# Altium PCB PCB1.PcbDoc
Units mm, origin at the board's own origin, x right, y up, seen from the top; angles counter-clockwise.
Board outline 152.4 x 101.6 mm, 2 copper layers (Top Layer, Bottom Layer); 55 components, 52 nets, 259 pads, 13 vias.
Unrouted connection lines stored in the file: 144.
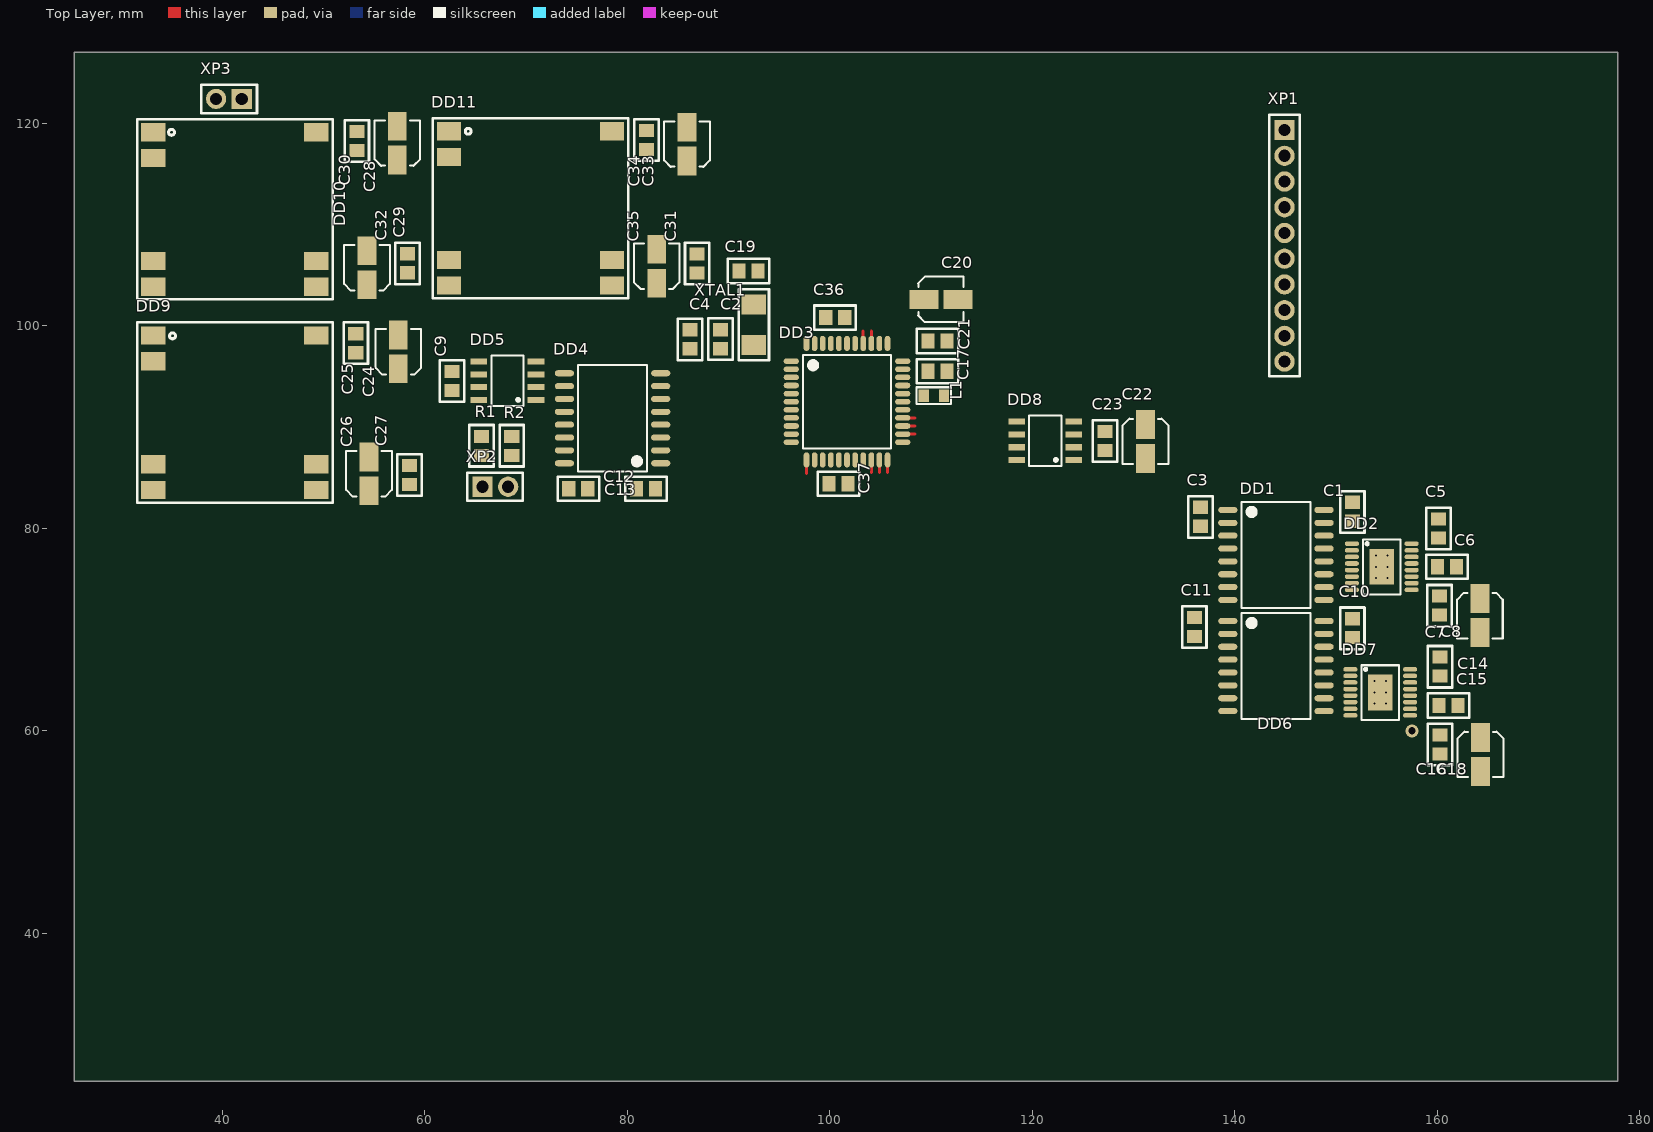
[diagram p0: Top Layer view]
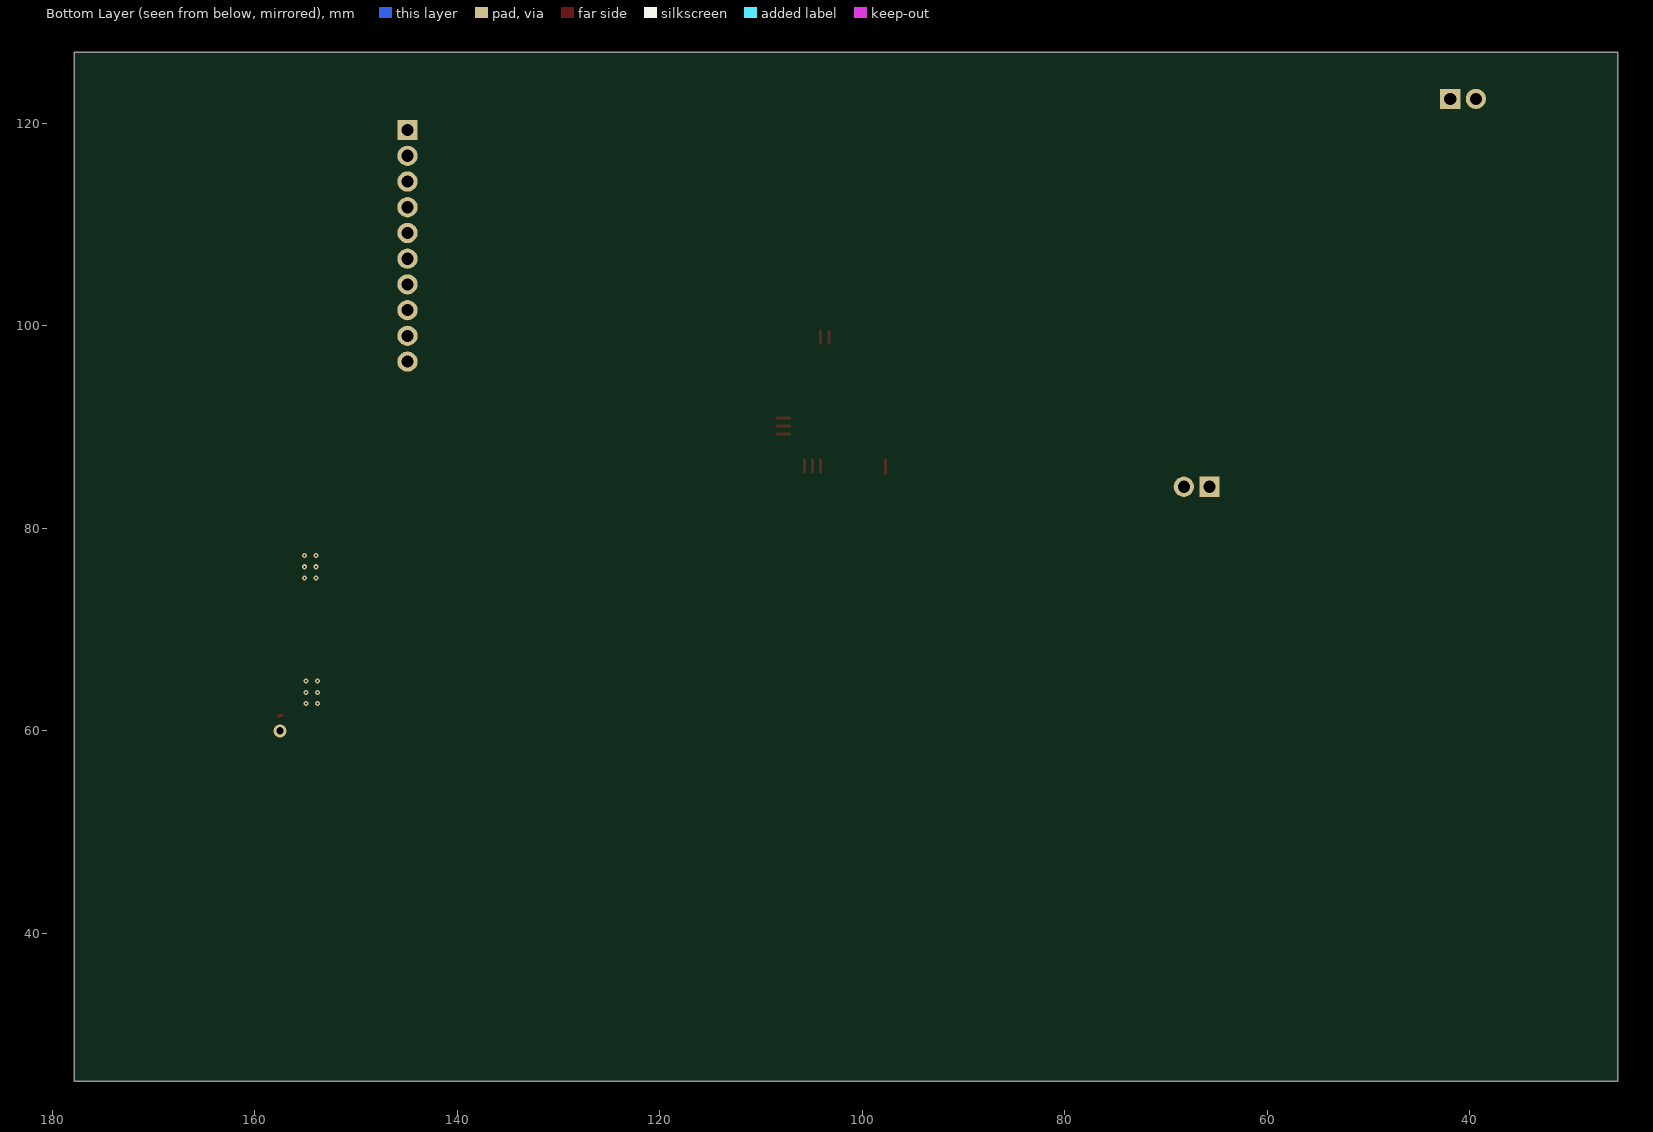
[diagram p1: Bottom Layer view, seen from below]

## Layer stack, top to bottom
Top Solder: solder mask 0.0102, Solder Resist, Dk 3.5
Top Layer: signal copper 0.0356
Dielectric 1: dielectric 0.32, FR-4, Dk 4.8
Bottom Layer: signal copper 0.0356
Bottom Solder: solder mask 0.0102, Solder Resist, Dk 3.5

## Board outline
25.4,25.4 177.8,25.4 177.8,127 25.4,127

## Design rules (kind name [scope] priority, off if disabled: settings)
Clearance [All] p1: gap=0.1 ignorepadtopadclearanceinfootprint=FALSE
HoleSize [All] p1: absolutevalues=TRUE maxlimit=5 minlimit=0.5 maxpercent=80.000 minpercent=20.000
HoleToHoleClearance [All] p1: gap=0.3 allowstackedmicrovias=TRUE
PolygonConnect [All] p1: connectstyle=Relief reliefconductorwidth=0.254 reliefentries=4 polygonreliefangle="90 Angle" airgapwidth=0.254
RoutingVias [All] p1: holewidth=0.6 width=1 viastyle="Through Hole" minholewidth=0.6 minwidth=1 maxholewidth=0.6 maxwidth=1
SilkToSilkClearance [All] p1: silktosilkclearance=0.3
SilkToSolderMaskClearance [IsPad] p1: minsilkscreentomaskgap=0.2 clearancetoexposedcopper=TRUE
SolderMaskExpansion [All] p1: expansion=0.102 istentingtop=FALSE
Width [All] p1: maxlimit=4 minlimit=0.2 preferedwidth=0.3
26 further rules are at their usual default settings.

## Components (designator, comment, footprint, x,y, rotation, side; value= is the part's Value field where it differs from the comment)
C1 "0.1мкФ" Capacitor_0805 151.6,82.575 r270 top
C2 "22пкФ" Capacitor_0805 89.2,97.725 r90 top
C3 "0.1мкФ" Capacitor_0805 136.6,82.075 r270 top
C4 "22пкФ" Capacitor_0805 86.2,99.6 r270 top
C5 "22пкФ" Capacitor_0805 160.1,79.025 r90 top
C6 "0.1мкФ" Capacitor_0805 160,76.2 r0 top
C7 "0.1мкФ" Capacitor_0805 160.2,73.3 r270 top
C8 "https://www.compel.ru/wordpress/wp-content/uploads/2014/02/yageo_ELCAP.pdf" CAPAE4643X46M 164.2,73.05 r270 top
C9 "0.1мкФ" Capacitor_0805 62.7,95.475 r270 top
C10 "0.1мкФ" Capacitor_0805 151.6,71.075 r270 top
C11 "0.1мкФ" Capacitor_0805 136,69.3 r90 top
C12 "0.1мкФ" Capacitor_0805 74.225,83.9 r0 top
C13 "0.1мкФ" Capacitor_0805 82.8,83.9 r180 top
C14 "0.022мкФ" Capacitor_0805 160.25,67.275 r270 top
C15 "0.1мкФ" Capacitor_0805 160.15,62.5 r0 top
C16 "0.1мкФ" Capacitor_0805 160.25,59.6 r270 top
C17 "0.1мкФ" Capacitor_0805 111.575,95.5 r180 top
C18 "https://www.compel.ru/wordpress/wp-content/uploads/2014/02/yageo_ELCAP.pdf" CAPAE4643X46M 164.25,59.35 r270 top
C19 "0.1мкФ" Capacitor_0805 91.025,105.4 r0 top
C20 "https://www.compel.ru/wordpress/wp-content/uploads/2014/02/yageo_ELCAP.pdf" CAPAE4643X46M 109.3,102.6 r0 top
C21 "0.1мкФ" Capacitor_0805 109.7,98.5 r0 top
C22 "https://www.compel.ru/wordpress/wp-content/uploads/2014/02/yageo_ELCAP.pdf" CAPAE4643X46M 131.175,90.25 r270 top
C23 "0.1мкФ" Capacitor_0805 127.175,89.55 r270 top
C24 "https://www.compel.ru/wordpress/wp-content/uploads/2014/02/yageo_ELCAP.pdf" CAPAE4643X46M 57.4,95.75 r90 top
C25 "0.1мкФ" Capacitor_0805 53.2,97.327 r90 top
C26 "https://www.compel.ru/wordpress/wp-content/uploads/2014/02/yageo_ELCAP.pdf" CAPAE4643X46M 54.5,83.7 r90 top
C27 "0.1мкФ" Capacitor_0805 58.5,84.325 r90 top
C28 "https://www.compel.ru/wordpress/wp-content/uploads/2014/02/yageo_ELCAP.pdf" CAPAE4643X46M 57.3,116.35 r90 top
C29 "0.1мкФ" Capacitor_0805 58.3,107.1 r270 top
C30 "0.1мкФ" Capacitor_0805 53.3,119.175 r270 top
C31 "0.1мкФ" Capacitor_0805 86.9,105.2 r90 top
C32 "https://www.compel.ru/wordpress/wp-content/uploads/2014/02/yageo_ELCAP.pdf" CAPAE4643X46M 54.3,104.05 r90 top
C33 "https://www.compel.ru/wordpress/wp-content/uploads/2014/02/yageo_ELCAP.pdf" CAPAE4643X46M 85.9,116.25 r90 top
C34 "0.1мкФ" Capacitor_0805 81.9,117.4 r90 top
C35 "https://www.compel.ru/wordpress/wp-content/uploads/2014/02/yageo_ELCAP.pdf" CAPAE4643X46M 82.9,104.2 r90 top
C36 "0.1мкФ" Capacitor_0805 101.475,100.8 r180 top
C37 "0.1мкФ" Capacitor_0805 101.8,84.4 r180 top
DD1 "ADuM1401" ADUM_SOIC 139.3,81.81 r0 top
DD2 "DRV8874" DRV8874_TSOP127P600-8N 151.55,78.475 r0 top
DD3 "ATMEGA16-8UA" ATMEGA16-44A 96.2,96.5 r0 top
DD4 "ADuM1301" ADUM_SOIC 83.3,86.42 r180 top
DD5 "ADM485" "SOIC_N8 (REF198, ADM485)" 71,92.66 r180 top
DD6 "ADuM1401" ADUM_SOIC 139.3,70.84 r0 top
DD7 "DRV8874" DRV8874_TSOP127P600-8N 151.4,66.075 r0 top
DD8 "REF198" "SOIC_N8 (REF198, ADM485)" 124.1,86.73 r180 top
DD9 "TMR-1-2411SM" TMR1SM_SMD 33.2,99.027 r180 top
DD10 "TDR-2-2411SM" TMR1SM_SMD 33.2,119.1 r180 top
DD11 "TMR-1-2411SM" TMR1SM_SMD 62.4,119.2 r180 top
L1 "Fixed inductor, 10мкГн, ±20%, 0805, 100mA, -55...+125°C" "IND: 0805" 110.275,93.1 r180 top value=10мкГн
R1 "120 Ом" resistor_0805 65.6,87.2 r90 top
R2 "120 Ом" resistor_0805 68.6,87.2 r90 top
XP1 "PIN_10" fpc_connector_10 144.9,119.32 r0 top
XP2 "PLS-2" fpc_connector_2pin 65.7,84.1 r90 top
XP3 "PLS-2" fpc_connector_2pin 41.94,122.4 r270 top
XTAL1 "8МГц" Z_0503 92.5,98.1 r90 top

## Footprints (in the part's own frame and the unit in brackets; to place one, negate y for a bottom-side part, rotate by r counter-clockwise, add the part's x,y. Pads: shape width x height; smd on the part's side, far side on the other; paste and mask are expansions set on the pad)
ADUM_SOIC [mm]
  oval 1.9x0.6 smd: 1(0,0) 2(0,-1.27) 3(0,-2.54) 4(0,-3.81) 5(0,-5.08) 6(0,-6.35) 7(0,-7.62) 8(0,-8.89) 9(9.5,-8.89) 10(9.5,-7.62) 11(9.5,-6.35) 12(9.5,-5.08) 13(9.5,-3.81) 14(9.5,-2.54) 15(9.5,-1.27) 16(9.5,0)
  silkscreen extent 1.35,-9.69 8.15,0.8
ATMEGA16-44A [mm]
  oval 1.5x0.55 smd: 1(0,0) 2(0,-0.8) 3(0,-1.6) 4(0,-2.4) 5(0,-3.2) 6(0,-4) 7(0,-4.8) 8(0,-5.6) 9(0,-6.4) 10(0,-7.2) 11(0,-8) 23(11,-8) 24(11,-7.2) 25(11,-6.4) 26(11,-5.6) 27(11,-4.8) 28(11,-4) 29(11,-3.2) 30(11,-2.4) 31(11,-1.6) 32(11,-0.8) 33(11,0)
  oval 0.55x1.5 smd: 12(1.5,-9.75) 13(2.3,-9.75) 14(3.1,-9.75) 15(3.9,-9.75) 16(4.7,-9.75) 17(5.5,-9.75) 18(6.3,-9.75) 19(7.1,-9.75) 20(7.9,-9.75) 21(8.7,-9.75) 22(9.5,-9.75) 34(9.5,1.75) 35(8.7,1.75) 36(7.9,1.75) 37(7.1,1.75) 38(6.3,1.75) 39(5.5,1.75) 40(4.7,1.75) 41(3.9,1.75) 42(3.1,1.75) 43(2.3,1.75) 44(1.5,1.75)
  silkscreen extent 1.15,-8.6 9.85,0.6, body extent 1.15,-8.6 9.85,0.6, height 1.2
Capacitor_0805 [mm]
  rect 1.3x1.5 smd: 1(0,0) 2(1.875,0)
  silkscreen extent -1.1,-1.2 3,1.2
CAPAE4643X46M [mm] "Aluminum Electrolytic Capacitor, Body 4,30x4,30x4,60mm, IPC Low Density"
  rect 2.85x1.85 smd: 1(0,0) 2(3.35,0)
  silkscreen extent -0.58,-2.25 3.93,2.25
DRV8874_TSOP127P600-8N [mm]
  oval 1.4x0.45 smd: 1(0,0) 2(0,-0.65) 3(0,-1.3) 4(0,-1.95) 5(0,-2.6) 6(0,-3.25) 7(0,-3.9) 8(0,-4.55) 9(5.9,-4.55) 10(5.9,-3.9) 11(5.9,-3.25) 12(5.9,-2.6) 13(5.9,-1.95) 14(5.9,-1.3) 15(5.9,-0.65) 16(5.9,0)
  rect 2.46x3.55 smd: 17(2.95,-2.275)
  silkscreen extent 1.1,-5 4.8,0.4
fpc_connector_2pin [mm]
  rect 2x2 hole 1.2: 1(0,0)
  round 2 hole 1.2: 2(0,-2.54)
  silkscreen extent -1.4,-4 1.4,1.5
fpc_connector_10 [mm] "10 pin"
  rect 2x2 hole 1.2: 1(0,0)
  round 2 hole 1.2: 2(0,-2.54) 3(0,-5.08) 4(0,-7.62) 5(0,-10.16) 6(0,-12.7) 7(0,-15.24) 8(0,-17.78) 9(0,-20.32) 10(0,-22.86)
  silkscreen extent -1.5,-24.3 1.5,1.5
"IND: 0805" [mm]
  rect 1x1.25 smd: 1(-1,0) 2(1,0)
  silkscreen extent -1.7,-0.82 1.7,0.82, body extent -1,-0.62 1,0.63, height 0.85
resistor_0805 [mm] "ЧИП-резистор типоразмера 0805"
  rect 1.3x1.5 smd: 1(0,0) 2(1.875,0)
  silkscreen extent -1.1,-1.2 3,1.2
"SOIC_N8 (REF198, ADM485)" [mm] "SOIC, 8-Leads, Body 4,90x3,90mm, Pitch 1,27mm, IPC Medium Density"
  rect 1.65x0.6 smd: 1(0,0) 2(0,-1.27) 3(0,-2.54) 4(0,-3.81) 5(5.65,-3.81) 6(5.65,-2.54) 7(5.65,-1.27) 8(5.65,0)
  silkscreen extent 1.22,-4.41 4.43,0.6
TMR1SM_SMD [mm]
  rect 2.4x1.8 smd: 1(0,0) 2(0,2.54) 6(0,12.7) 7(0,15.24) 8(-16.1,15.24) 9(-16.1,12.7) 14(-16.1,0)
  silkscreen extent -17.7,-1.3 1.6,16.5
Z_0503 [mm]
  rect 2x2.4 smd: 1(0,0) 2(4,0)
  silkscreen extent -1.5,-1.5 5.5,1.5

## Part data
C1 C2 C3 C4 C5 C6 C7 C9 C10 C11 C12 C13 C14 C15 C16 C17 C19 C21 C23 C25 C27 C29 C30 C31 C34 C36 C37: library part Capacity_0805
C8 C18 C20 C22 C24 C26 C28 C32 C33 C35: library part Capacity_electrolity_polar_0805
DD3: library part ATMEGA16-44A
L1: library part Inductor_0805, Manufacturer="Murata Electronics", MaxCurrent=100mA, Package=0805, PartNumber=LQM21FN100M70L, Temperature=-55...+125°C, Tolerance=±20%, TypeInductor="Fixed inductor", HelpURL=https://www.digikey.com/product-detail/en/murata-electronics-north-america/LQM21FN100M70L/490-4029-1-ND/1016289, ValueManufacturerPartNumber="Fixed inductor, 10мкГн, ±20%, 0805, 100mA, -55...+125°C"
R1 R2: library part Resistor_0805
XP1: "https://www.chipdip.ru/product/tyco-1-640457-0", ComponentLink1Description="New link"
XP2 XP3: library part DS1023-1x2
XTAL1: library part resonstor

## Via types
v1: diameter 0.5, hole 0.2, Top Layer to Bottom Layer, 12 vias
v2: diameter 1.27, hole 0.711, Top Layer to Bottom Layer, 1 vias

## Nets (pads, with @x,y where several pads share a name; then routed paths per layer and width w, separated by ;. In a path a pad name is that pad's centre, name@x,y a point inside that pad or via, vN(x,y) a via of type N, cw(c..) or ccw(c..) an arc to the next point about the centre after c; other vN are vias at no path point)
+5B: C1.2 C2.2 C3.2 C4.2 C10.2 C11.1 C11.2 C12.2 C13.1 C13.2 C17.2 C19.1 C19.2 C21.2 C23.1 C23.2 C29.1 C29.2 C36.1 C36.2 C37.1 C37.2 DD1.2 DD1.7 DD1.8 DD1.9 DD1.15 DD3.5 DD3.6 DD3.17 DD3.18 DD3.28 DD3.38 DD3.39 DD4.1 DD4.2 DD4.7 DD4.8 DD4.9 DD4.15 DD6.1 DD6.2 DD6.7 DD6.8 DD6.9 DD6.15 DD8.2 DD8.4 DD10.8 DD10.9 L1.1 XP1.7 XP1.8
+5B_DRV: C1.1 C10.1 C31.1 DD1.10 DD1.16 DD2.5 DD6.10 DD6.16 DD7.5 DD11.8
+5B_RS: C9.2 C12.1 C27.1 DD4.10 DD4.16 DD5.8 DD9.8
+27B: C6.2 C7.1 C15.2 C16.1 DD2.11 DD7.11
DRV11: DD3.22 DD6.3 | length 1.2
  Top Layer w0.3: 105.7,85.5 DD3.22
DRV12: DD3.21 DD6.4 | length 1.2
  Top Layer w0.3: 104.9,85.5 DD3.21
DRV13: DD3.20 DD6.5 | length 1.2
  Top Layer w0.3: 104.1,85.5 DD3.20
DRV14: DD3.12 DD6.6 | length 1.3
  Top Layer w0.3: 97.7,85.4 DD3.12
DRV21: DD1.3 DD3.26 | length 1.2
  Top Layer w0.3: DD3.26 108.4,90.9
DRV22: DD1.4 DD3.25 | length 1.2
  Top Layer w0.3: DD3.25 108.4,90.1
DRV23: DD1.5 DD3.24 | length 1.2
  Top Layer w0.3: DD3.24 108.4,89.3
DRV24: DD1.6 DD3.11
GND: C7.2 C16.2 DD2.9 DD7.9 | length 0.4
  Top Layer w0.3: DD7.9 157.581,61.525 DD7.9@157.65,61.456
NetC2_1: C2.1 DD3.7
NetC3_1: C3.1 DD1.1
NetC4_1: C4.1 DD3.8 XTAL1.1
NetC5_1: C5.1 DD2.14
NetC5_2: C5.2 DD2.13
NetC6_1: C6.1 DD2.12
NetC14_1: C14.1 DD7.14
NetC14_2: C14.2 DD7.13
NetC15_1: C15.1 DD7.12
NetC17_1: C17.1 DD3.27 L1.2
NetC20_5: C21.1 DD3.29 DD8.6
NetC24_4: C25.2 C30.2 C34.2 DD9.1 DD10.1 DD11.1 XP3.2
NetC24_5: C25.1 C30.1 C34.1 DD9.14 DD10.14 DD11.14 XP3.1
NetDD1_11: DD1.11 DD2.4
NetDD1_12: DD1.12 DD2.3
NetDD1_13: DD1.13 DD2.2
NetDD1_14: DD1.14 DD2.1
NetDD2_8: DD2.8 XP1.3
NetDD2_10: DD2.10 XP1.4
NetDD3_9: DD3.9 DD4.5
NetDD3_10: DD3.10 DD4.4
NetDD3_13: DD3.13 DD4.3
NetDD4_12: DD4.12 DD5.1
NetDD4_13: DD4.13 DD5.4
NetDD4_14: DD4.14 DD5.2 DD5.3
NetDD5_6: DD5.6 R1.1
NetDD5_7: DD5.7 R2.1
NetDD6_11: DD6.11 DD7.4
NetDD6_12: DD6.12 DD7.3
NetDD6_13: DD6.13 DD7.2
NetDD6_14: DD6.14 DD7.1
NetDD7_8: DD7.8 XP1.5
NetDD7_10: DD7.10 XP1.6
NetR1_0: XP2.1
NetR2_0: XP2.2
POT1: DD3.37 XP1.1 | length 1.3
  Top Layer w0.3: DD3.37 103.3,99.5
POT2: DD3.36 XP1.2 | length 1.3
  Top Layer w0.3: DD3.36 104.1,99.5
Общ_DRV: C31.2 DD2.6 DD2.7 DD2.15 DD2.16 DD7.6 DD7.7 DD7.15 DD7.16 DD11.9
Общ_RS: C9.1 C27.2 DD5.5 DD9.9
pads on no net: C8.1 C8.2 C18.1 C18.2 C20.1 C20.2 C22.1 C22.2 C24.1 C24.2 C26.1 C26.2 C28.1 C28.2 C32.1 C32.2 C33.1 C33.2 C35.1 C35.2 DD2.17 DD3.1 DD3.2 DD3.3 DD3.4 DD3.14 DD3.15 DD3.16 DD3.19 DD3.23 DD3.30 DD3.31 DD3.32 DD3.33 DD3.34 DD3.35 DD3.40 DD3.41 DD3.42 DD3.43 DD3.44 DD4.6 DD4.11 DD7.17 DD8.1 DD8.3 DD8.5 DD8.7 DD8.8 DD9.2 DD9.6 DD9.7 DD10.2 DD10.6 DD10.7 DD11.2 DD11.6 DD11.7 R1.2 R2.2 XP1.9 XP1.10 XTAL1.2
copper on no net:
  other v1: 153.8,62.7 154.9,62.7 153.8,63.8 154.9,63.8 153.8,64.9 154.9,64.9 153.95,75.1 155.05,75.1 153.95,76.2 155.05,76.2 153.95,77.3 155.05,77.3
  other v2: 157.5,60

## Silkscreen, mask and mechanical layers (free items; w line width, h text height)
Top Overlay:
  lines w0.3: 35.286,119.148 ccw(c35,119.1) 35.29,119.1 ; 35.386,99.048 ccw(c35.1,99) 35.39,99 ; 64.586,119.248 ccw(c64.3,119.2) 64.59,119.2